# Altium PCB Copy of RT_SUPER_MK90.PCBdoc (part 2 of 3)
Units mil, origin at the board's own origin, x right, y up, seen from the top; angles counter-clockwise.
Board outline 1549.87 x 1549.87 mil, 4 copper layers (Top Layer, GND, PWR, Bottom Layer), stack 39.556 mil thick; 179 components, 119 nets, 506 pads, 207 vias.
Unrouted connection lines stored in the file: 7.
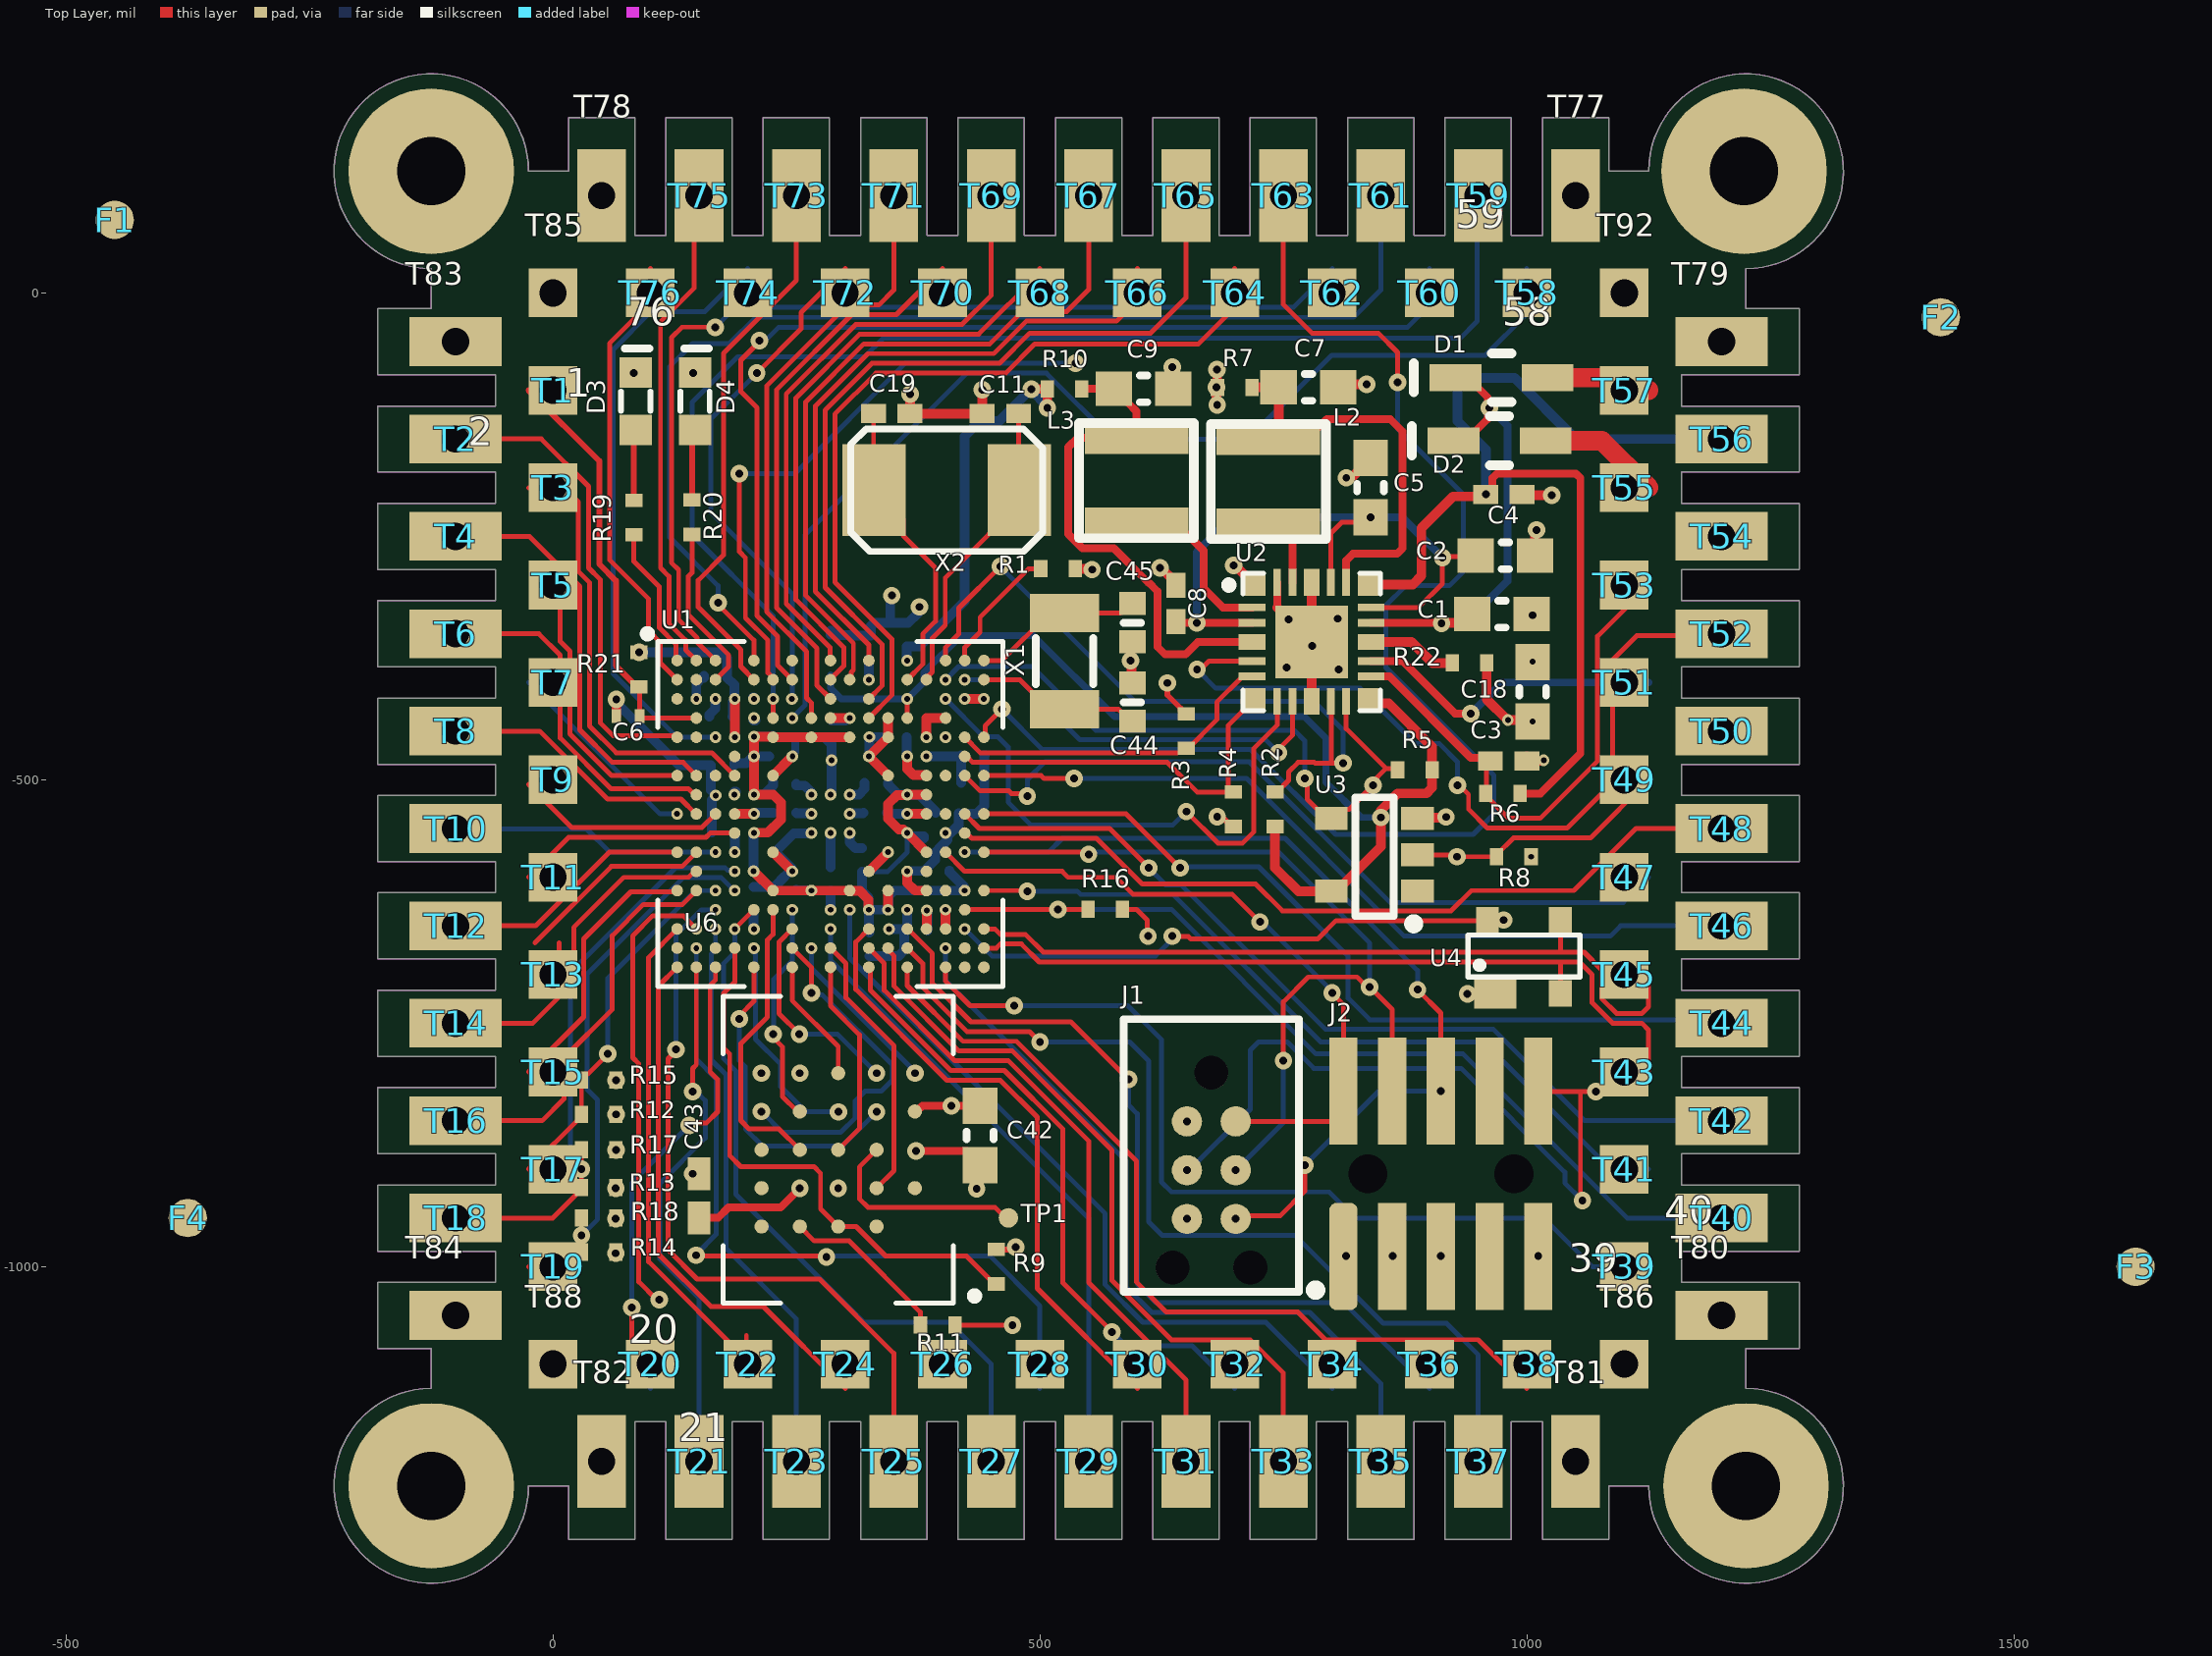
[diagram p0: Top Layer view]

## Via types
v1: diameter 18, hole 8, Top Layer to Bottom Layer, tented both sides, 124 vias
v2: diameter 12, hole 6, Top Layer to Bottom Layer, tented both sides, 83 vias

## Nets (pads, with @x,y where several pads share a name; then routed paths per layer and width w, separated by ;. In a path a pad name is that pad's centre, name@x,y a point inside that pad or via, vN(x,y) a via of type N, cw(c..) or ccw(c..) an arc to the next point about the centre after c; other vN are vias at no path point) (continued)
+1v8: (continued)
  PWR w10: v2(186.57,-574.37) 186.19,-573.99 186.19,-561.19 180,-555 156.36,-555 128,-583.36 128,-679 143,-694 359.16,-694 402.73,-650.43 402.73,-633.81 v2(403.11,-633.43) 403.11,-600.89 412,-592 443.14,-592 449,-586.14 449,-502.15 v2(403.11,-456.26) 403.11,-436.57 404.09,-435.59 ; v2(186.57,-416.89) v2(186.57,-456.26) 186.57,-482.57 200,-496 343.69,-496 v2(363.74,-475.94) 364,-475.69 364,-437.82 361.77,-435.59 ; v2(363.74,-377.52) 329.86,-377.52 324.75,-382.62 324.75,-396.82 v2(324.37,-397.2) 324.75,-397.59 324.75,-412.35 347.99,-435.59 361.77,-435.59 ; v2(442.48,-416.89) v2(422.8,-416.89) 422.8,-429.73 416.94,-435.59 404.09,-435.59 ; 361.77,-435.59 404.09,-435.59
  Bottom Layer w10: v1(88.36,-369.02) 173.03,-369.02 178.89,-374.88 178.89,-395.08 186.19,-402.38 186.19,-416.51 v2(186.57,-416.89) 186.57,-417.43 184.49,-419.52 184.49,-434.92 C39.2@184.41,-435 ; v2@186.03,-574.37 v2(186.57,-574.37) 186.92,-574.03 186.92,-553.92 C40.2@187,-553.84 ; v2@324.47,-397.11 v2(324.37,-397.2) 324.37,-375.9 324.45,-375.82 C36.2@324.57,-375.82 ; C41.2@363,-456 363,-474.66 363.74,-475.4 v2(363.74,-475.94) ; C37.2@363,-362.94 376.38,-362.94 422.8,-316.53 422.8,-147.2 438.55,-131.45 458.34,-131.45 491.32,-98.47 491.32,-100.03 507.62,-116.33 v1(507.62,-117.89) ; C37.2@363.3,-362.94 363.38,-363.02 363.38,-376.65 v2@364,-377.26
+1v8_AO: C10.2 R2.2 R5.2 U1.C13 U1.D13 U2.12 U3.5 | length 1146.1
  Top Layer w5: U1.D13@363.74,-436.57 v2(363.74,-416.89)
  Top Layer w10: R2.2@741.38,-547.99 741.38,-590.14 765.62,-614.38 U3.5@799.14,-614.38 804.35,-614.38 850,-568.73 v1(850,-538.63) 850,-531.22 867.25,-513.98 896.82,-513.98 902.68,-508.12 R5.2@902.68,-489.59 902.68,-466 858.19,-421.5 842.09,-421.5 U2.12@838.03,-417.44
  Bottom Layer w7: C10.2@285,-392.28 285,-406 295.89,-416.89 v2(363.74,-416.89) 380.8,-399.83 380.8,-389.88 418.94,-351.74 493.38,-351.74 576.64,-435 771.41,-435 793.81,-457.41 793.81,-502.75 829.69,-538.63 v1(850,-538.63)
+3v3: C12.2 C13.2 C14.2 C15.2 C16.2 C17.2 C18.2 C20.2 C21.2 C22.2 C23.2 C24.2 C25.2 C42.1 C43.1 J1.1 J2.1 R3.2 R4.2 R8.2 R9.2 R12.2 R13.2 R14.2 R22.2 T50.1 U1.E6 U1.E8 U1.E10 U1.H13 U1.H14 U1.K13 U1.L14 U1.N12 U1.N16 U1.P11 U1.P12 U6.B4 U6.D1 U6.E4 | length 1450.7
  Top Layer w6: R9.2@455.28,-982.28 472.72,-982.28 v1(475,-980) ; v1(630.91,-400.55) 630.91,-412.88 644.46,-426.43 644.46,-428.39 648.35,-432.28 R3.2@650.31,-432.28 ; v1(682,-538) 684.3,-540.3 689.09,-540.3 696.78,-547.99 R4.2@698.74,-547.99
  Top Layer w8: v1(64.5,-986.25) 64.72,-986.04 R14.2@64.72,-985 ; v1(64.5,-919.37) 64.72,-919.15 R13.2@64.72,-918.52 ; C43.1@150,-949.85 169.47,-949.85 180.33,-939 233.87,-939 v1(253.5,-919.37) ; U6.D1@371.61,-840.63 373.39,-840.63 379.32,-834.7 v1(408.93,-834.7) C42.1@438.54,-834.7 ; J2.1@811.67,-989.58 812.33,-988.91 v1(814.41,-988.91)
  Top Layer w10: v2(206,-594) 206.2,-594 206.26,-594.06 225.94,-613.74 v2(265.32,-613.74) 304.69,-613.74 305.07,-614.12 315.12,-614.12 323.99,-622.99 323.99,-633.04 v2(324.37,-633.43) ; v2(206.26,-554.69) 206.64,-554.3 220.7,-554.3 234,-541 234,-523.37 225.94,-515.32 v2(206.26,-515.32) v2(206.26,-475.94) v2(206.26,-455.88) 225.56,-455.88 U1.E6@225.94,-456.26 U1.E8@265.32,-456.26 U1.E10@304.69,-456.26 ; v2(344.06,-633.43) U1.N12@344.06,-613.74 ; U1.K13@359.51,-551 355.06,-551 344.06,-540 344.06,-524.94 353.3,-515.7 363.36,-515.7 v2(363.74,-515.32) U1.H14@383.43,-515.32 ; v2(363.74,-554.69) U1.L14@383.43,-574.37 ; R22.2@958.72,-380 958.72,-417.41 979.99,-438.67 v2(980.45,-438.67) ; v2@984.78,-438.67 1004.69,-438.67 v2(1006,-439.98)
  PWR w50: T50.1@1153.89,-448.89 1155,-450 T50.1@1225,-450
  Bottom Layer w5: C15.2@317.48,-594.24 343.75,-594.24 363.74,-574.26 v2(363.74,-554.69)
  Bottom Layer w10: C16.2@186,-485 186,-483.19 186.08,-483.11 198.55,-483.11 205.72,-475.94 v2(206.26,-475.94) ; v2(206,-594) C20.2@206,-574 206.08,-573.92 206.08,-554.87 v2(206.26,-554.69) ; v2(206.26,-515.32) 206.64,-514.93 216.88,-514.93 226,-505.81 C21.2@226,-504 226,-502.19 C21.2@225.92,-502.11 ; v2(206.26,-455.88) 206.64,-455.49 225.41,-455.49 225.49,-455.42 C17.2@225.49,-454.88 ; v2(206.26,-475.94) C13.2@221.97,-475.97 ; C24.2@250,-613 250,-613.29 250.08,-613.37 264.94,-613.37 v2(265.32,-613.74) ; C15.2@317.48,-594.24 317.48,-614.32 323.99,-620.83 323.99,-633.04 v2(324.37,-633.43) ; C12.2@325,-657 324.37,-656.37 v2(324.37,-633.43) ; C22.2@344,-503 344,-504.81 354.12,-514.93 363.36,-514.93 v2(363.74,-515.32) 364.12,-515.7 376.39,-515.7 392.88,-532.19 C25.2@392.88,-534 ; v2(363.74,-554.69) 364.28,-554.69 367.71,-558.11 380.8,-558.11 380.88,-558.19 C23.2@380.88,-560 ; C14.2@407.24,-593.07 407.24,-594.88 422.41,-610.06 422.41,-613.36 v2(422.8,-613.74) 349.91,-613.74 344.44,-619.22 344.44,-633.04 v2(344.06,-633.43) v2(324.37,-633.43)
  other v1: 651,-850.85 64.72,-843.61 253.5,-801.26
  other v2: 1004.38,-578.95
+5vUSB: D2.1 T55.1 U1.R16 U4.4 | length 1215.6
  Top Layer w5: v1(636,-660.57) 636.38,-660.96 652.5,-660.96 655,-663.46 785.17,-663.46 804.06,-644.56 U4.4@959.5,-644.56 975.44,-644.56 v1(976,-644)
  Top Layer w20: D2.1@1019.12,-151.79 1076.79,-151.79 1125,-200
  PWR w5: v1(976,-644) 1058.52,-561.48 1058.52,-266.48 1125,-200
  Bottom Layer w5: v2(422.8,-653.11) 422.97,-653.11 450.76,-680.9 618.56,-680.9 636,-663.46 v1(636,-660.57)
+VBATT: C4.2 R6.2 T56.1 U2.18 | length 1114.7
  Top Layer w8: v1(957.78,-206.89) 960.73,-206.89 964.69,-202.93 964.69,-190.19 969.37,-185.51 1050.31,-185.51 1055,-190.19 1055,-472.96 1013.97,-513.99 R6.2@993.04,-513.99
  Top Layer w10: U2.18@838.03,-299.33 882.89,-299.33 891.66,-290.57 891.66,-241.42 924.07,-209.01 955.65,-209.01 v1(957.78,-206.89)
  Bottom Layer w10: v1(957.78,-206.89) 957.78,-160.72 928.8,-131.75 928.8,-92.92 934.66,-87.06 987.06,-87.06 1050,-150 T56.1@1225,-150